# Altium PCB 2518_MEZ.PcbDoc
Units mm, origin at the board's own origin, x right, y up, seen from the top; angles counter-clockwise.
Board outline 63 x 64 mm, 2 copper layers (Top Layer, Bottom Layer); 5 components, 39 nets, 276 pads, 179 vias.
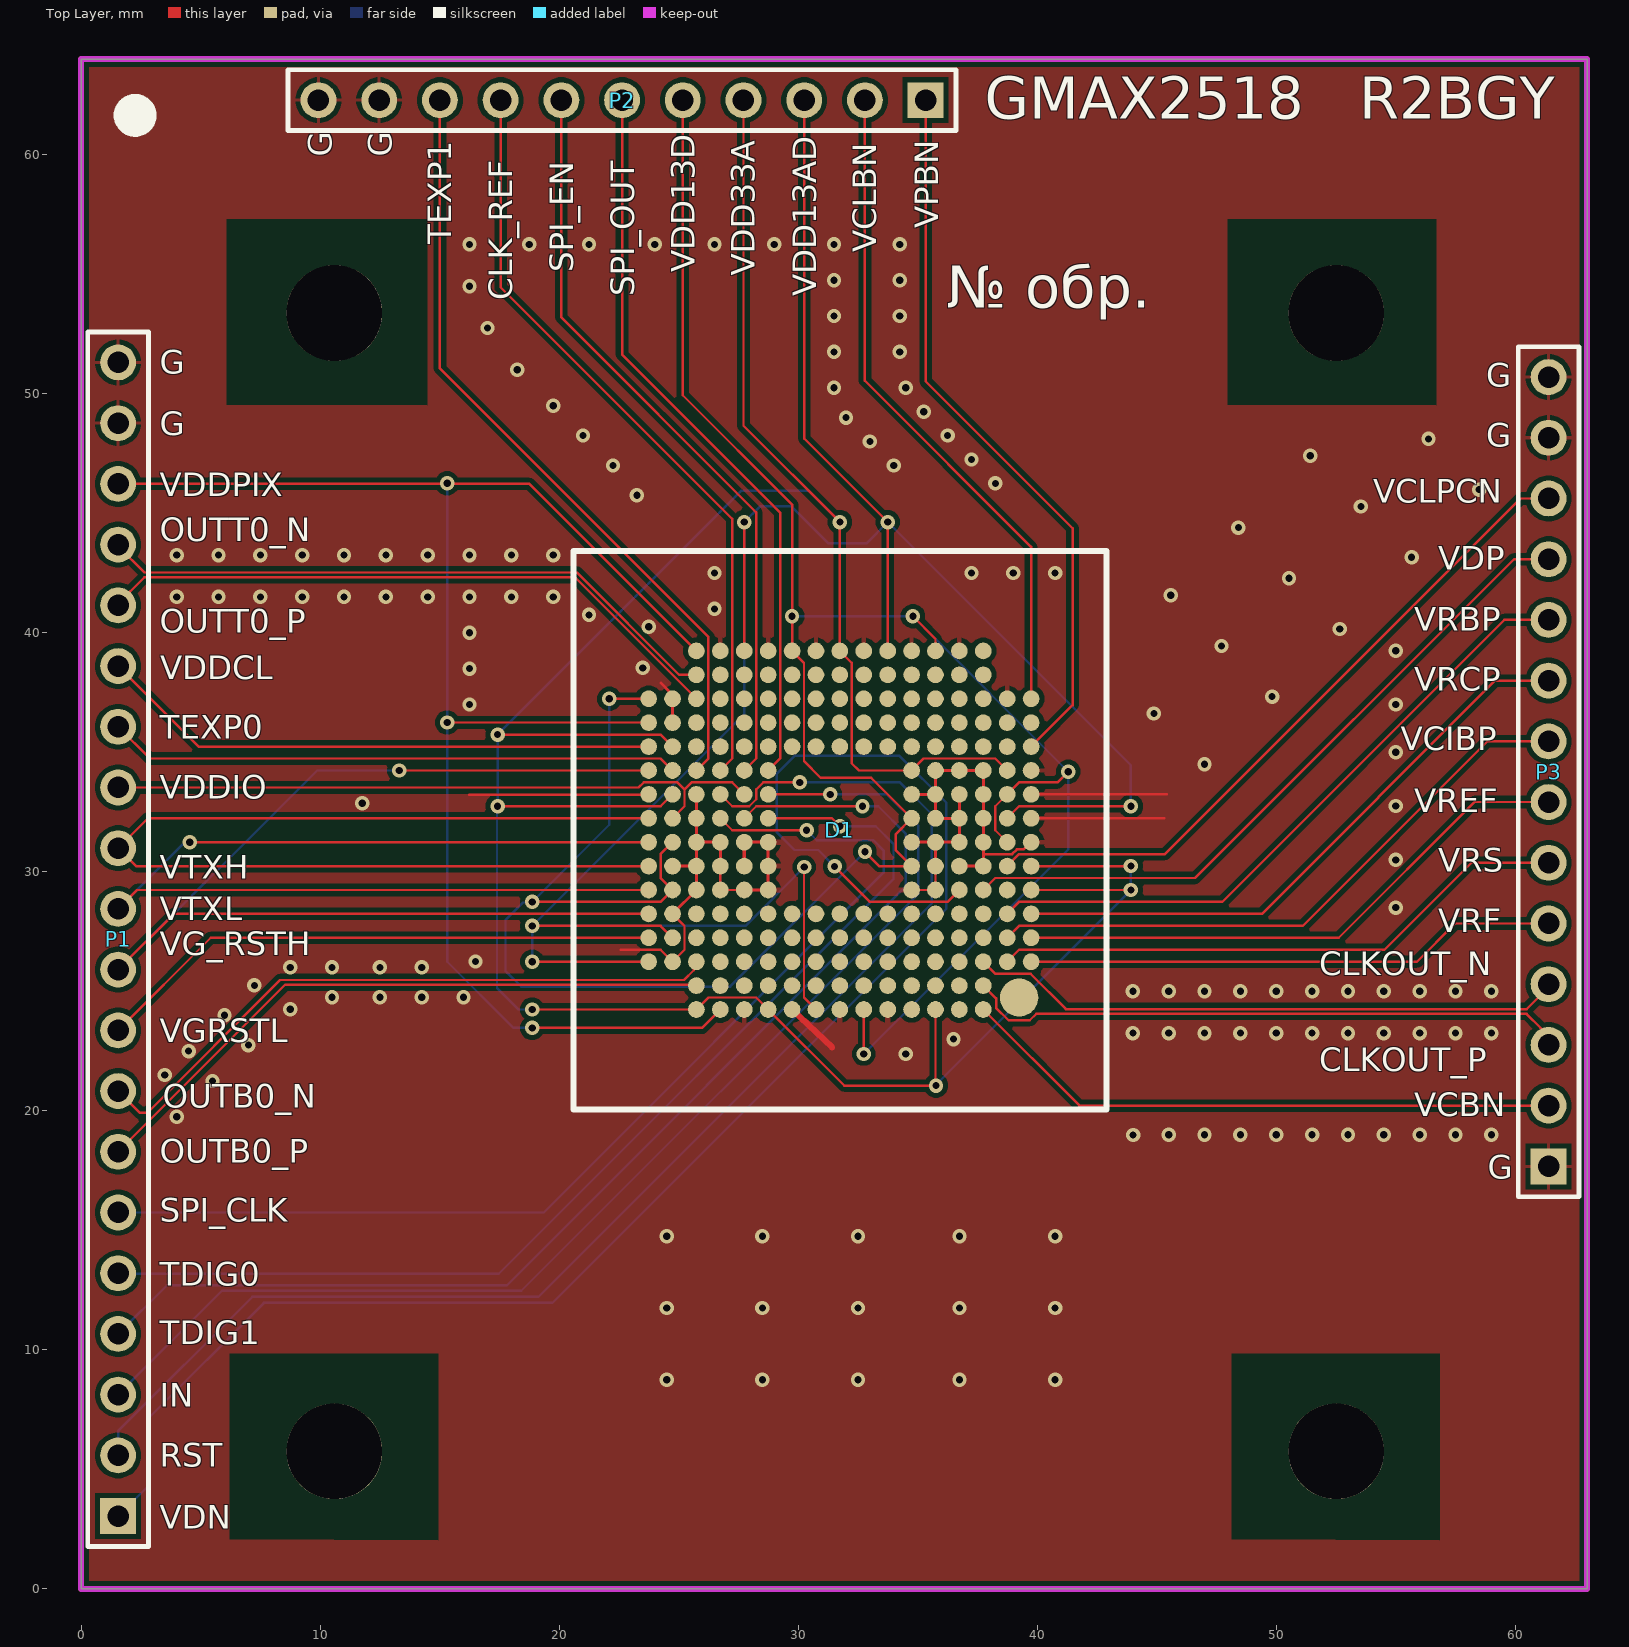
[diagram p0: Top Layer view]
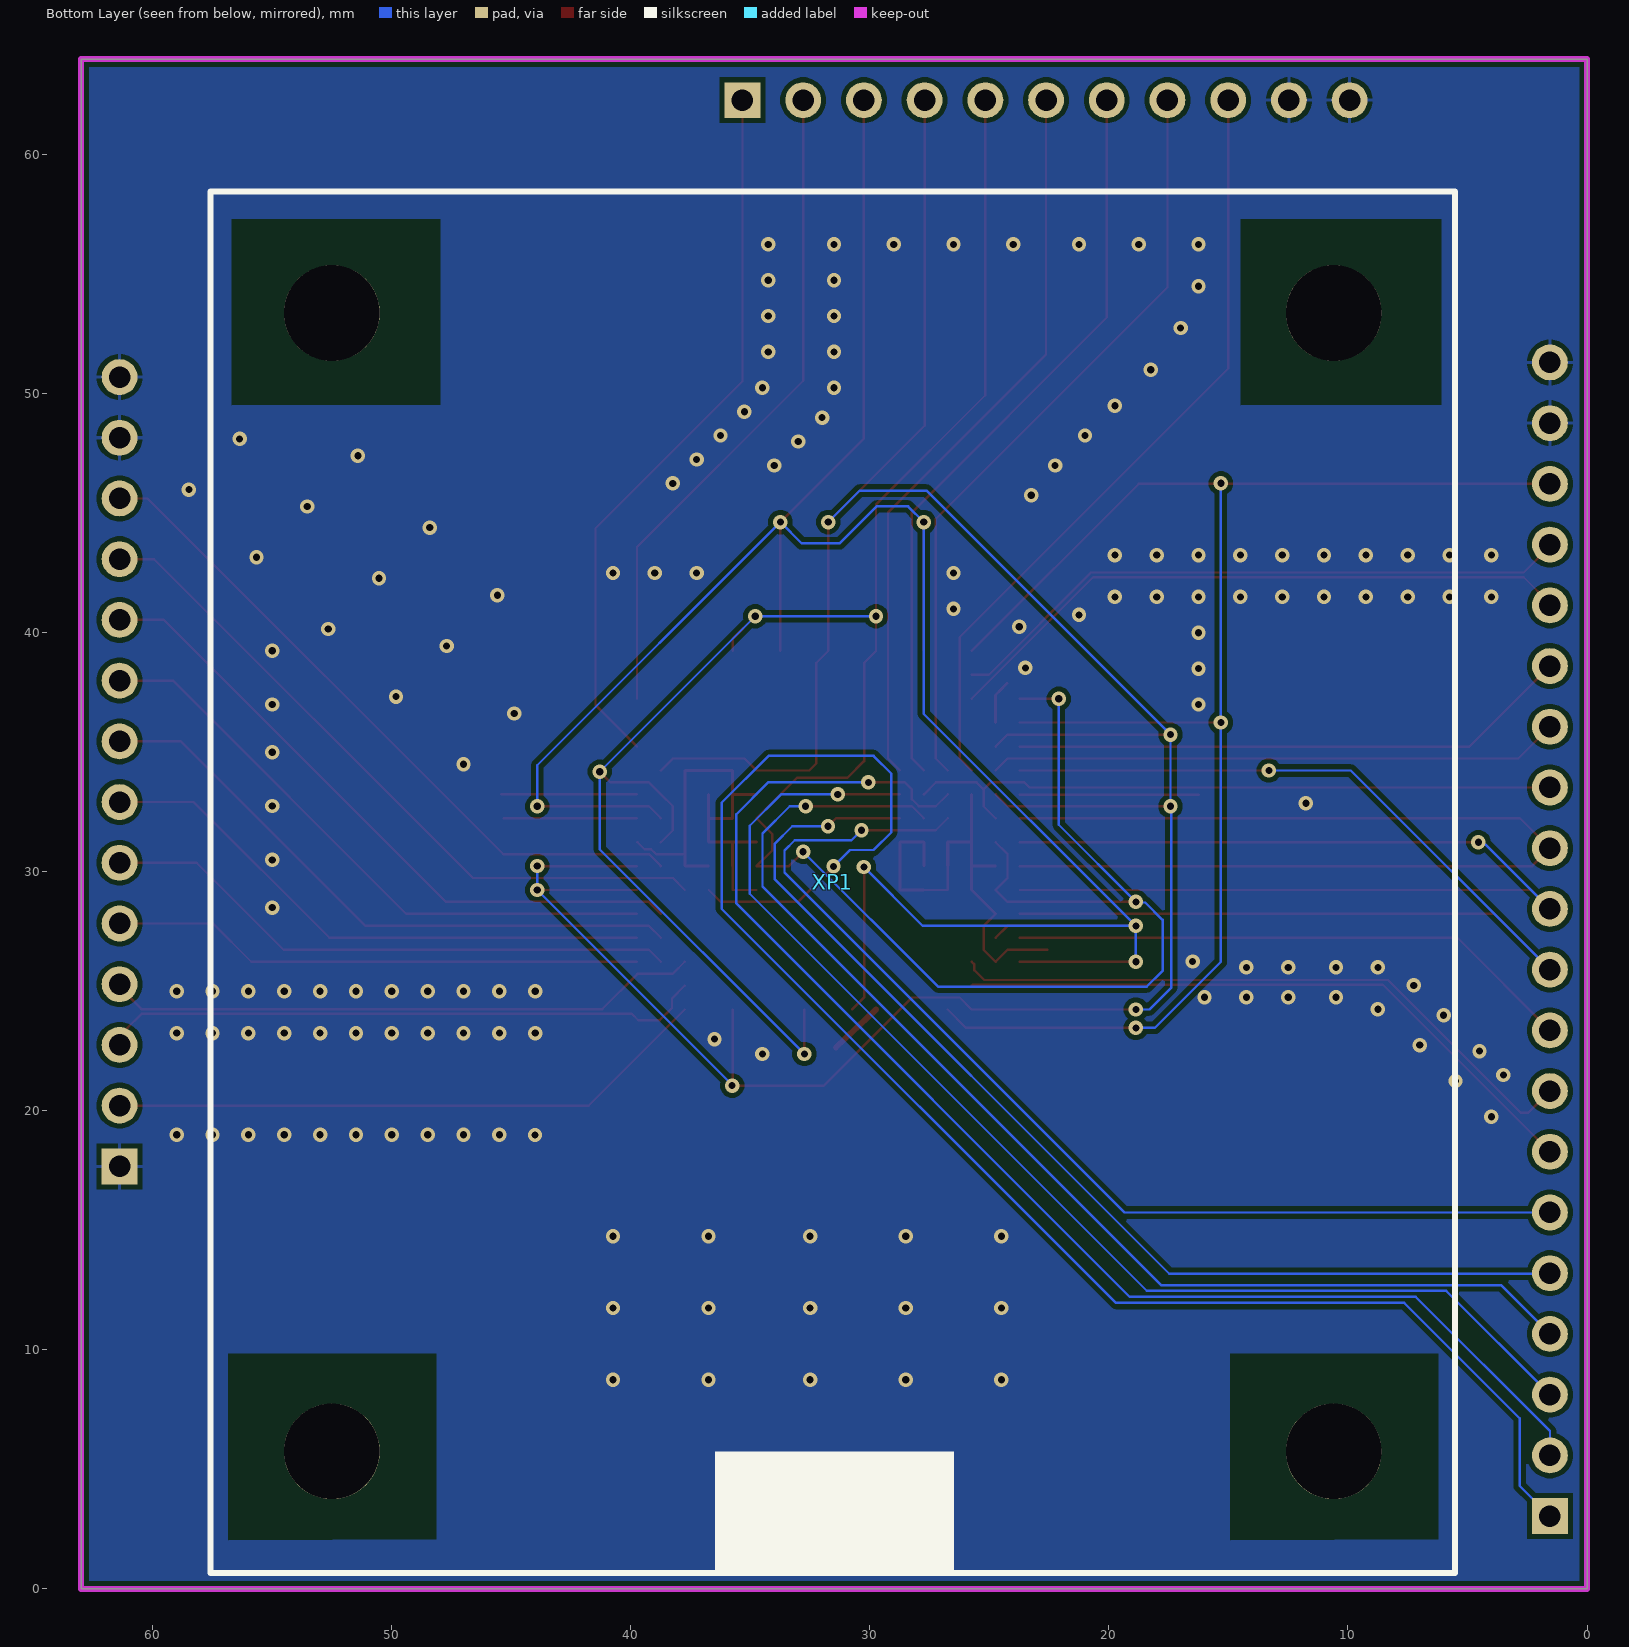
[diagram p1: Bottom Layer view, seen from below]

## Layer stack, top to bottom
Top Solder: solder mask 0.0102, Solder Resist, Dk 3.5
Top Layer: signal copper 0.0356
Dielectric 1: dielectric 0.32, FR-4, Dk 4.8
Bottom Layer: signal copper 0.0356
Bottom Solder: solder mask 0.0102, Solder Resist, Dk 3.5

## Board outline
0,0 0,64 63,64 63,0

## Design rules (kind name [scope] priority, off if disabled: settings)
BoardOutlineClearance [OnLayer('Multi-Layer')] p1: gap=0.254 ignorepadtopadclearanceinfootprint=FALSE except(0: Arc-SplitContinuation Track-SplitContinuation SMDPad-SplitContinuation THPad-SplitContinuation Via-SplitContinuation Fill-SplitContinuation Poly-SplitContinuation Region-SplitContinuation Text-SplitContinuation; 0.4: Arc-OutlineEdge Track-OutlineEdge SMDPad-OutlineEdge THPad-OutlineEdge Via-OutlineEdge Fill-OutlineEdge Poly-OutlineEdge Region-OutlineEdge Text-OutlineEdge)
Clearance [All] p1: gap=0.125 ignorepadtopadclearanceinfootprint=FALSE except(0.1: Track-Track Track-SMDPad Track-THPad Track-Via; 0.2: Arc-Fill Arc-Poly Track-Fill Track-Poly SMDPad-Fill SMDPad-Poly THPad-Fill THPad-Poly Via-Fill Via-Poly Fill-Fill Fill-Poly Poly-Poly Poly-Region Poly-Text; 0.25: Arc-Hole Track-Hole SMDPad-Hole THPad-Hole Via-Hole Fill-Hole Poly-Hole Region-Hole Text-Hole) // Standart
DiffPairsRouting [All] p1: maxlimit=0.254 minlimit=0.1 mostfreqgap=0.1 toplayer_minwidth=0.1 toplayer_maxwidth=0.381 toplayer_prefwidth=0.1 bottomlayer_minwidth=0.1 bottomlayer_maxwidth=0.381 bottomlayer_prefwidth=0.1 maxuncoupledlength=12.7
HoleSize [All] p1: absolutevalues=TRUE maxlimit=5 minlimit=0.3 maxpercent=80.000 minpercent=20.000
MinimumSolderMaskSliver [All] p1: minsoldermaskwidth=0.075
PlaneClearance "PlaneClearance-1 1/2 Oz" [All] p1: clearance=0.2 // Standart
PlaneConnect "TermalConnect-1 1/2 Oz" [All] p1: planeconnectstyle=Relief reliefexpansion=0.2 reliefentries=4 reliefconductorwidth=0.2 reliefairgap=0.2 // Standart
PolygonConnect "PolygonConnect-1 1/2 Oz" [All] p1: thpad.connectstyle=Relief thpad.reliefconductorwidth=0.15 thpad.reliefentries=4 thpad.polygonreliefangle="90 Angle" thpad.airgapwidth=0.2 smdpad.connectstyle=Relief smdpad.reliefconductorwidth=0.2 smdpad.reliefentries=4 smdpad.polygonreliefangle="90 Angle" smdpad.airgapwidth=0.2 via.connectstyle=Direct via.reliefconductorwidth=0.254 via.reliefentries=4 via.polygonreliefangle="90 Angle" via.airgapwidth=0.254 // Standart
RoutingVias [All] p1: holewidth=0.3 width=1.27 viastyle="Through Hole" minholewidth=0.3 minwidth=0.6 maxholewidth=0.711 maxwidth=1.27
SilkToSilkClearance [All] p1: silktosilkclearance=0
SilkToSolderMaskClearance [IsPad] p1: minsilkscreentomaskgap=0 clearancetoexposedcopper=TRUE
SolderMaskExpansion [All] p1: expansion=0.102 istentingtop=FALSE
UnRoutedNet [All] p1: checkbadconnections=TRUE
Width [All] p1: maxlimit=2.5 minlimit=0.1 preferedwidth=0.1
22 further rules are at their usual default settings.

## Classes and differential pairs
differential pair OUTT0: +OUTT0_P -OUTT0_N
differential pair OUTB0: +OUTB0_P -OUTB0_N
differential pair CLKOUT: +CLKOUT_P -CLKOUT_N

## Components (designator, comment, footprint, x,y, rotation, side; value= is the part's Value field where it differs from the comment)
D1 "GMAX2518" GMAX2518 39.243,24.74 r0 top
P1 "Header 20" HDR1X20 1.549,3.048 r90 top
P2 "Header 11" HDR1X11 35.331,62.281 r180 top
P3 "Header 14" HDR1X14 61.392,17.678 r90 top
XP1 "Грелка" Грелка 10.598,53.377 r90 bottom

## Footprints (in the part's own frame and the unit in brackets; to place one, negate y for a bottom-side part, rotate by r counter-clockwise, add the part's x,y. Pads: shape width x height; smd on the part's side, far side on the other; paste and mask are expansions set on the pad)
GMAX2518 [mm] "GMAX2518"
  round 1.6 smd: 3(0,0)
  round 0.7 smd: A3(-1.5,-0.5) A4(-2.5,-0.5) A5(-3.5,-0.5) A6(-4.5,-0.5) A7(-5.5,-0.5) A8(-6.5,-0.5) A9(-7.5,-0.5) A10(-8.5,-0.5) A11(-9.5,-0.5) A12(-10.5,-0.5) A13(-11.5,-0.5) A14(-12.5,-0.5) A15(-13.5,-0.5) B3(-1.5,0.5) B4(-2.5,0.5) B5(-3.5,0.5) B6(-4.5,0.5) B7(-5.5,0.5) B8(-6.5,0.5) B9(-7.5,0.5) B10(-8.5,0.5) B11(-9.5,0.5) B12(-10.5,0.5) B13(-11.5,0.5) B14(-12.5,0.5) B15(-13.5,0.5) C1(0.5,1.5) C2(-0.5,1.5) C3(-1.5,1.5) C4(-2.5,1.5) C5(-3.5,1.5) C6(-4.5,1.5) C7(-5.5,1.5) C8(-6.5,1.5) C9(-7.5,1.5) C10(-8.5,1.5) C11(-9.5,1.5) C12(-10.5,1.5) C13(-11.5,1.5) C14(-12.5,1.5) C15(-13.5,1.5) C16(-14.5,1.5) C17(-15.5,1.5) D1(0.5,2.5) D2(-0.5,2.5) D3(-1.5,2.5) D4(-2.5,2.5) D5(-3.5,2.5) D6(-4.5,2.5) D7(-5.5,2.5) D8(-6.5,2.5) D9(-7.5,2.5) D10(-8.5,2.5) D11(-9.5,2.5) D12(-10.5,2.5) D13(-11.5,2.5) D14(-12.5,2.5) D15(-13.5,2.5) D16(-14.5,2.5) D17(-15.5,2.5) E1(0.5,3.5) E2(-0.5,3.5) E3(-1.5,3.5) E4(-2.5,3.5) E5(-3.5,3.5) E6(-4.5,3.5) E7(-5.5,3.5) E8(-6.5,3.5) E9(-7.5,3.5) E10(-8.5,3.5) E11(-9.5,3.5) E12(-10.5,3.5) E13(-11.5,3.5) E14(-12.5,3.5) E15(-13.5,3.5) E16(-14.5,3.5) E17(-15.5,3.5) F1(0.5,4.5) F2(-0.5,4.5) F3(-1.5,4.5) F4(-2.5,4.5) F5(-3.5,4.5) F6(-4.5,4.5) F12(-10.5,4.5) F13(-11.5,4.5) F14(-12.5,4.5) F15(-13.5,4.5) F16(-14.5,4.5) F17(-15.5,4.5) G1(0.5,5.5) G2(-0.5,5.5) G3(-1.5,5.5) G4(-2.5,5.5) G5(-3.5,5.5) G6(-4.5,5.5) G12(-10.5,5.5) G13(-11.5,5.5) G14(-12.5,5.5) G15(-13.5,5.5) G16(-14.5,5.5) G17(-15.5,5.5) H1(0.5,6.5) H2(-0.5,6.5) H3(-1.5,6.5) H4(-2.5,6.5) H5(-3.5,6.5) H6(-4.5,6.5) H12(-10.5,6.5) H13(-11.5,6.5) H14(-12.5,6.5) H15(-13.5,6.5) H16(-14.5,6.5) H17(-15.5,6.5) J1(0.5,7.5) J2(-0.5,7.5) J3(-1.5,7.5) J4(-2.5,7.5) J5(-3.5,7.5) J6(-4.5,7.5) J12(-10.5,7.5) J13(-11.5,7.5) J14(-12.5,7.5) J15(-13.5,7.5) J16(-14.5,7.5) J17(-15.5,7.5) K1(0.5,8.5) K2(-0.5,8.5) K3(-1.5,8.5) K4(-2.5,8.5) K5(-3.5,8.5) K6(-4.5,8.5) K12(-10.5,8.5) K13(-11.5,8.5) K14(-12.5,8.5) K15(-13.5,8.5) K16(-14.5,8.5) K17(-15.5,8.5) L1(0.5,9.5) L2(-0.5,9.5) L3(-1.5,9.5) L4(-2.5,9.5) L5(-3.5,9.5) L6(-4.5,9.5) L12(-10.5,9.5) L13(-11.5,9.5) L14(-12.5,9.5) L15(-13.5,9.5) L16(-14.5,9.5) L17(-15.5,9.5) M1(0.5,10.5) M2(-0.5,10.5) M3(-1.5,10.5) M4(-2.5,10.5) M5(-3.5,10.5) M6(-4.5,10.5) M7(-5.5,10.5) M8(-6.5,10.5) M9(-7.5,10.5) M10(-8.5,10.5) M11(-9.5,10.5) M12(-10.5,10.5) M13(-11.5,10.5) M14(-12.5,10.5) M15(-13.5,10.5) M16(-14.5,10.5) M17(-15.5,10.5) N1(0.5,11.5) N2(-0.5,11.5) N3(-1.5,11.5) N4(-2.5,11.5) N5(-3.5,11.5) N6(-4.5,11.5) N7(-5.5,11.5) N8(-6.5,11.5) N9(-7.5,11.5) N10(-8.5,11.5) N11(-9.5,11.5) N12(-10.5,11.5) N13(-11.5,11.5) N14(-12.5,11.5) N15(-13.5,11.5) N16(-14.5,11.5) N17(-15.5,11.5) P1(0.5,12.5) P2(-0.5,12.5) P3(-1.5,12.5) P4(-2.5,12.5) P5(-3.5,12.5) P6(-4.5,12.5) P7(-5.5,12.5) P8(-6.5,12.5) P9(-7.5,12.5) P10(-8.5,12.5) P11(-9.5,12.5) P12(-10.5,12.5) P13(-11.5,12.5) P14(-12.5,12.5) P15(-13.5,12.5) P16(-14.5,12.5) P17(-15.5,12.5) R3(-1.5,13.5) R4(-2.5,13.5) R5(-3.5,13.5) R6(-4.5,13.5) R7(-5.5,13.5) R8(-6.5,13.5) R9(-7.5,13.5) R10(-8.5,13.5) R11(-9.5,13.5) R12(-10.5,13.5) R13(-11.5,13.5) R14(-12.5,13.5) R15(-13.5,13.5) T3(-1.5,14.5) T4(-2.5,14.5) T5(-3.5,14.5) T6(-4.5,14.5) T7(-5.5,14.5) T8(-6.5,14.5) T9(-7.5,14.5) T10(-8.5,14.5) T11(-9.5,14.5) T12(-10.5,14.5) T13(-11.5,14.5) T14(-12.5,14.5) T15(-13.5,14.5)
  silkscreen extent -18.65,-4.67 3.65,18.68
HDR1X11 [mm] "Connector; Header; 11 Position"
  rect 1.5x1.5 hole 0.9: 1(0,0)
  round 1.5 hole 0.9: 2(2.54,0) 3(5.08,0) 4(7.62,0) 5(10.16,0) 6(12.7,0) 7(15.24,0) 8(17.78,0) 9(20.32,0) 10(22.86,0) 11(25.4,0)
  silkscreen extent -1.27,-1.27 26.67,1.27
HDR1X14 [mm] "Connector; Header; 14 Position"
  rect 1.5x1.5 hole 0.9: 1(0,0)
  round 1.5 hole 0.9: 2(2.54,0) 3(5.08,0) 4(7.62,0) 5(10.16,0) 6(12.7,0) 7(15.24,0) 8(17.78,0) 9(20.32,0) 10(22.86,0) 11(25.4,0) 12(27.94,0) 13(30.48,0) 14(33.02,0)
  silkscreen extent -1.27,-1.27 34.29,1.27
HDR1X20 [mm] "Connector; Header; 20 Position"
  rect 1.5x1.5 hole 0.9: 1(0,0)
  round 1.5 hole 0.9: 2(2.54,0) 3(5.08,0) 4(7.62,0) 5(10.16,0) 6(12.7,0) 7(15.24,0) 8(17.78,0) 9(20.32,0) 10(22.86,0) 11(25.4,0) 12(27.94,0) 13(30.48,0) 14(33.02,0) 15(35.56,0) 16(38.1,0) 17(40.64,0) 18(43.18,0) 19(45.72,0) 20(48.26,0)
  silkscreen extent -1.27,-1.27 49.53,1.27
Грелка [mm]
  round 4 hole 4 unplated: 0(-47.625,0) 0(-47.625,41.91) 0(0,0) 0(0,41.91)
  silkscreen extent -52.7,-5.08 5.08,46.99

## Part data
P1: "Header, 20-Pin", LatestRevisionDate=17-Jul-2002, LatestRevisionNote="Re-released for DXP Platform.", Publisher="Altium Limited"
P2: "Header, 11-Pin", LatestRevisionDate=17-Jul-2002, LatestRevisionNote="Re-released for DXP Platform.", Publisher="Altium Limited"
P3: "Header, 14-Pin", LatestRevisionDate=17-Jul-2002, LatestRevisionNote="Re-released for DXP Platform.", Publisher="Altium Limited"

## Via types
v1: diameter 0.6, hole 0.3, Top Layer to Bottom Layer, 179 vias

## Nets (pads, with @x,y where several pads share a name; then routed paths per layer and width w, separated by ;. In a path a pad name is that pad's centre, name@x,y a point inside that pad or via, vN(x,y) a via of type N, cw(c..) or ccw(c..) an arc to the next point about the centre after c; other vN are vias at no path point)
CLK_REF: D1.L14 P2.8 | length 32.3
  Top Layer w0.1: P2.8 17.551,54.458 27.243,44.766 27.243,34.74 D1.L14
CLKOUT_N: D1.C3 P3.4 | length 25
  Top Layer w0.1: D1.C3 38.252,25.73 39.726,25.73 41.199,24.257 42.066,24.257 60.477,24.257 61.392,25.171 P3.4
CLKOUT_P: D1.B3 P3.3 | length 25.4
  Top Layer w0.1: D1.B3 38.278,24.705 38.278,24.308 38.796,23.79 39.69,23.79 39.957,24.057 42.034,24.057 42.149,24.057 60.474,24.057 61.046,23.485 61.046,23.483 61.392,23.137 P3.3
GND: D1.A7 D1.A9 D1.A11 D1.A13 D1.C16 D1.E16 D1.F5 D1.F6 D1.F12 D1.F13 D1.F14 D1.F15 D1.G3 D1.G4 D1.G5 D1.G12 D1.G13 D1.G14 D1.G15 D1.G16 D1.H1 D1.H3 D1.H4 D1.H5 D1.H6 D1.H12 D1.H13 D1.H14 D1.H15 D1.J1 D1.J3 D1.J4 D1.J5 D1.J15 D1.K1 D1.K3 D1.K4 D1.K5 D1.K6 D1.K15 D1.K17 D1.L1 D1.L3 D1.L4 D1.L5 D1.N16 D1.P2 D1.P16 D1.T4 D1.T6 D1.T8 D1.T10 D1.T12 D1.T14 P1.19 P1.20 P2.10 P2.11 P3.1 P3.13 P3.14 | length 63.3
  Top Layer w0.1: 16.231,33.223 D1.K17@23.727,33.223 ; 22.58,26.746 22.586,26.74 24.243,26.74 D1.C16 25.243,26.74 25.243,27.74 D1.E16 ; D1.G14 D1.F14 D1.F13 ; D1.F6 D1.F5 D1.G5 ; 37.743,30.74 38.95,30.74 39.15,30.94 39.419,30.94 39.719,31.24 D1.H1 ; D1.J1 45.321,32.24 ; D1.K1 45.424,33.24
  Top Layer w0.127: 24.257,37.897 24.573,37.58 24.573,37.564 24.743,37.395 D1.P16 D1.N16 ; D1.E16 D1.F15 D1.G15 ; D1.G16 D1.G15 ; D1.K15 D1.J15 D1.H15 ; D1.G14 D1.H14 D1.H15 ; D1.F13 D1.F12 D1.G12 D1.H12 D1.H13 D1.G13 ; D1.H6 D1.H5 ; D1.K6 D1.K5 ; D1.G5 D1.H5 ; D1.J5 D1.K5 ; D1.J5@35.75,32.233 D1.J4@36.736,32.233 ; D1.G4 D1.G3 37.743,30.74 D1.H3 D1.J3 D1.K3 D1.L3 D1.L4 D1.L5 D1.K5 ; D1.K4 D1.J4 D1.H4 D1.H5 ; D1.G15 D1.H15
  Top Layer w0.254: D1.A11 31.42,22.657
  other v1: 24.5,8.75 28.5,8.75 32.5,8.75 36.75,8.75 40.75,8.75 24.5,11.75 28.5,11.75 32.5,11.75 36.75,11.75 40.75,11.75 24.5,14.75 28.5,14.75 32.5,14.75 36.75,14.75 40.75,14.75 44.01,18.99 45.5,19 47,19 48.5,19 50,19 51.5,19 53,19 54.5,19 56,19 57.5,19 59,19 4,19.75 5.5,21.25 3.5,21.5 34.5,22.377 4.5,22.5 7,22.75 36.5,23 44,23.25 45.5,23.25 47,23.25 48.5,23.25 50,23.25 51.5,23.25 53,23.25 54.5,23.25 56,23.25 57.5,23.25 59,23.25 6,24 8.75,24.25 10.5,24.75 12.5,24.75 14.25,24.75 16,24.75 44,25 45.5,25 47,25 48.5,25 50,25 51.5,25 53,25 54.5,25 56,25 57.5,25 59,25 7.25,25.25 8.75,26 10.5,26 12.5,26 14.25,26 16.5,26.25 55,28.5 55,30.5 55,32.75 11.761,32.869 47,34.5 55,35 44.879,36.621 16.25,37 55,37 49.828,37.328 16.25,38.5 23.495,38.532 55,39.25 47.707,39.45 16.25,40 52.657,40.157 23.75,40.25 21.25,40.75 26.5,41 4,41.5 5.75,41.5 7.5,41.5 9.25,41.5 11,41.5 12.75,41.5 14.5,41.5 16.25,41.5 18,41.5 19.75,41.5 45.586,41.571 50.536,42.278 26.5,42.5 37.25,42.5 39,42.5 40.75,42.5 55.662,43.162 4,43.25 5.75,43.25 7.5,43.25 9.25,43.25 11,43.25 12.75,43.25 14.5,43.25 16.25,43.25 18,43.25 19.75,43.25 48.414,44.399 53.541,45.283 23.25,45.75 58.49,45.99 38.25,46.25 22.25,47 34,47 37.25,47.25 51.419,47.405 33,48 56.369,48.112 21,48.25 36.25,48.25 32,49 35.25,49.25 19.75,49.5 31.5,50.25 34.5,50.25 18.25,51 31.5,51.75 34.25,51.75 17,52.75 31.5,53.25 34.25,53.25 16.25,54.5 31.5,54.75 34.25,54.75 16.25,56.25 18.75,56.25 21.25,56.25 24,56.25 26.5,56.25 29,56.25 31.5,56.25 34.25,56.25
OUTB0_N: D1.C15 P1.8 | length 27.3
  Top Layer w0.1: P1.8 2.464,19.914 2.765,19.914 8.324,25.473 25.219,25.473 25.628,25.882 25.628,26.125 D1.C15
OUTB0_P: D1.B15 P1.7 | length 27.1
  Top Layer w0.1: P1.7 8.534,25.273 25.71,25.273 D1.B15
OUTT0_N: D1.R15 P1.17 | length 26.4
  Top Layer w0.1: P1.17@1.549,43.619 2.649,42.52 20.746,42.52 25.026,38.24 D1.R15
OUTT0_P: D1.P15 P1.16 | length 26.8
  Top Layer w0.1: P1.16@1.549,41.22 2.649,42.32 20.663,42.32 D1.P15
SPI_CLK: D1.J14 P1.6 | length 46.2
  Top Layer w0.1: D1.J14 27.243,31.74 v1@30.353,31.74
  Bottom Layer w0.1: P1.6 19.355,15.748 33.573,29.966 33.573,30.892 33.147,31.318 30.776,31.318 v1(30.354,31.741)
SPI_EN: D1.L13 P2.7 | length 31.6
  Top Layer w0.1: P2.7 20.091,53.188 28.243,45.036 28.243,34.74 D1.L13
SPI_IN: D1.K12 P1.3 | length 51.8
  Top Layer w0.1: D1.K12 v1@31.344,33.24
  Bottom Layer w0.1: P1.3 5.893,12.471 18.415,12.471 35.027,29.083 35.027,31.928 33.714,33.241 v1(31.345,33.241)
SPI_OUT: D1.L12 P2.6 | length 31
  Top Layer w0.1: P2.6 22.631,51.638 29.243,45.027 29.243,34.74 D1.L12
SYS_RST_N: D1.K14 P1.2 | length 58.2
  Top Layer w0.1: D1.K14 27.243,32.74 27.95,32.74 28.243,33.032 28.243,33.447 28.536,33.74 v1(30.065,33.74)
  Bottom Layer w0.1: P1.2 1.549,6.604 7.163,12.217 19.126,12.217 35.585,28.677 35.585,32.41 34.256,33.74 v1(30.065,33.74)
TDIG0: D1.J12 P1.5 | length 46.4
  Top Layer w0.1: D1.J12 31.413,32.24 v1@31.75,31.902
  Bottom Layer w0.1: P1.5@1.549,13.183 17.475,13.183 33.985,29.693 33.985,31.166 33.248,31.903 v1(31.751,31.903)
TDIG1: D1.J13 P1.4 | length 50.3
  Top Layer w0.1: D1.J13 28.243,32.74 v1(32.69,32.741) v1(32.69,32.741)
  Bottom Layer w0.1: P1.4 3.581,12.7 17.805,12.7 34.493,29.388 34.493,31.598 33.35,32.741 v1(32.69,32.741)
TEXP0: D1.L16 P1.14 | length 24
  Top Layer w0.1: P1.14 2.878,34.74 23.95,34.74 24.243,34.74 D1.L16
TEXP1: D1.L15 P2.9 | length 32.9
  Top Layer w0.1: P2.9 15.011,51.054 26.243,39.822 26.243,34.74 D1.L15
VCBN: D1.A3 P3.2 | length 25.3
  Top Layer w0.1: D1.A3 41.764,20.218 P3.2
VCIBP: D1.D2 P3.8 | length 26.1
  Top Layer w0.1: D1.D2 39.243,27.74 51.108,27.74 58.826,35.458 P3.8
VCLBN: D1.P1 P2.2 | length 27.9
  Top Layer w0.1: P2.2 32.791,50.546 39.743,43.594 D1.P1
VCLPCN: D1.G2 P3.12 | length 29.1
  Top Layer w0.1: D1.G2 39.243,30.74 45.339,30.74 60.218,45.618 P3.12@61.498,45.618
VDD13AD: D1.A10 D1.C17 D1.D16 D1.J2 D1.T7 D1.T13 P2.3 | length 110.2
  Top Layer w0.1: v1@18.872,26.24 D1.C17 ; v1@18.872,27.737 23.317,27.737 23.32,27.74 24.243,27.74 D1.D16 ; D1.T13 v1@27.743,44.628 ; v1@30.243,30.201 30.243,24.74 D1.A10 ; P2.3 30.251,48.121 v1(33.744,44.629) ; D1.T7 v1@33.743,44.628 ; D1.J2 39.243,32.74 v1@43.917,32.74
  Bottom Layer w0.1: v1(18.873,26.241) v1(18.873,27.738) ; v1(30.251,30.201) 27.789,27.738 v1(18.873,27.738) ; v1(43.918,32.741) 43.918,34.455 v1(33.744,44.629) 32.854,43.739 31.267,43.739 29.718,45.288 28.403,45.288 v1(27.744,44.629) 27.744,36.609 v1(18.873,27.738)
VDD13D: D1.A8 D1.F16 D1.G6 D1.H2 D1.H16 D1.J6 D1.K2 D1.P17 D1.T5 D1.T11 P2.5 | length 119.8
  Top Layer w0.1: v1@18.872,28.74 24.243,28.74 D1.F16 24.243,29.74 24.243,30.74 D1.H16 ; v1@22.101,37.24 D1.P17 ; P2.5 25.171,49.936 29.744,45.364 29.744,40.691 D1.T11 ; D1.T11 30.243,38.74 30.243,34.629 30.937,33.934 33.048,33.934 D1.J6 34.087,31.583 34.087,30.896 D1.G6 33.387,30.24 v1@32.791,30.836 ; v1(32.741,22.377) D1.A8@32.744,24.24 ; v1(34.798,40.691) 35.743,39.746 D1.T5 ; D1.H2 38.243,31.74 38.243,32.74 D1.K2 39.243,33.74 40.852,33.74 v1(41.3,34.188)
  Bottom Layer w0.1: v1(22.098,37.236) 22.098,31.965 v1(18.873,28.741) 18.851,28.718 18.482,28.718 17.755,27.991 17.755,25.857 18.415,25.197 27.153,25.197 v1(32.792,30.837) ; v1(29.743,40.691) v1(34.798,40.691) v1(41.3,34.188) 41.3,30.937 v1(32.741,22.377)
VDD33A: D1.A5 D1.A12 D1.A15 D1.F1 D1.G1 D1.K16 D1.L2 D1.L6 D1.M16 D1.T9 P2.4 | length 125.9
  Top Layer w0.1: v1@17.425,32.74 24.243,32.74 D1.K16 ; v1(17.424,35.738) 17.426,35.74 24.243,35.74 D1.M16 ; v1@18.872,24.24 D1.A15 26.243,24.74 28.243,24.74 D1.A12 31.926,21.057 v1(35.763,21.057) ; P2.4 27.711,48.661 v1(31.744,44.629) ; v1@31.743,44.628 D1.T9 32.243,38.74 32.243,34.534 32.537,34.24 D1.L6 35.243,34.74 38.243,34.74 D1.L2 ; v1@35.743,21.077 D1.A5 ; D1.F1 v1@43.917,29.24 ; D1.G1 v1@43.917,30.24
  Bottom Layer w0.1: v1@17.399,32.715 17.399,25.146 18.304,24.241 v1(18.873,24.241) ; v1(17.424,32.741) v1(17.424,35.738) 27.635,45.949 30.424,45.949 v1(31.744,44.629) ; v1@35.748,21.071 v1(43.918,29.241) v1(43.918,30.241)
VDDCL: D1.M17 P1.15 | length 23.6
  Top Layer w0.1: P1.15 4.918,35.24 D1.M17
VDDIO: D1.J16 D1.K13 P1.13 | length 28.1
  Top Layer w0.1: P1.13 23.324,33.528 23.536,33.74 24.95,33.74 25.243,33.447 ; D1.J16 25.243,32.74 25.243,33.447 ; D1.K13 27.243,33.74 25.536,33.74 25.243,33.447
VDDPIX: D1.A14 D1.N17 D1.T15 P1.18 | length 68.4
  Top Layer w0.1: P1.18 v1@15.291,46.228 ; v1(15.316,36.246) D1.N17@23.737,36.246 ; v1@15.342,46.228 18.755,46.228 D1.T15 ; v1@18.872,23.47 25.973,23.47 D1.A14
  Bottom Layer w0.1: v1(15.316,46.253) v1(15.316,36.246) 15.316,26.238 18.084,23.471 v1(18.873,23.471)
VDN: D1.F4 P1.1 | length 71
  Top Layer w0.1: v1@31.521,30.226 33.008,28.74 36.243,28.74 D1.F4
  Bottom Layer w0.1: P1.1 2.819,4.318 2.819,7.137 7.645,11.963 19.71,11.963 36.195,28.448 36.195,32.893 34.239,34.849 29.845,34.849 29.108,34.112 29.108,31.648 29.845,30.912 30.838,30.912 v1(31.522,30.227)
VDP: D1.F3 P3.11 | length 29.4
  Top Layer w0.1: D1.F3 38.243,29.74 46.605,29.74 59.944,43.078 P3.11
VG_RSTH: D1.E17 D1.L17 P1.10 | length 48.8
  Top Layer w0.1: P1.10 3.881,28.24 D1.E17 ; v1(13.31,34.24) D1.L17
  Bottom Layer w0.1: P1.10 9.881,34.24 v1(13.31,34.24)
VGRSTL: D1.D17 P1.9 | length 23.8
  Top Layer w0.1: P1.9 5.421,27.24 D1.D17
VPBN: D1.M1 P2.1 | length 30.3
  Top Layer w0.1: P2.1 35.331,50.521 41.478,44.374 41.478,36.975 D1.M1
VRBP: D1.E2 P3.10 | length 27.7
  Top Layer w0.1: D1.E2 39.243,28.74 47.739,28.74 59.538,40.538 P3.10
VRCP: D1.E1 P3.9 | length 25.7
  Top Layer w0.1: D1.E1 49.398,28.24 59.157,37.998 P3.9
VREF: D1.D1 P3.7 | length 24
  Top Layer w0.1: D1.D1 52.614,27.24 58.293,32.918 P3.7
VRF: D1.C1 P3.5 | length 22.3
  Top Layer w0.1: D1.C1 55.881,26.24 57.48,27.838 P3.5
VRS: D1.C2 P3.6 | length 24.4
  Top Layer w0.1: D1.C2 39.243,26.74 54.527,26.74 58.166,30.378 P3.6
VTXH: D1.G17 D1.J17 P1.12 | length 45.2
  Top Layer w0.1: D1.G17 2.298,30.24 P1.12 2.801,32.24 D1.J17
VTXL: D1.F17 D1.H17 P1.11 | length 45.9
  Top Layer w0.1: P1.11 2.341,29.24 D1.F17 ; v1@4.545,31.24 D1.H17
  Bottom Layer w0.1: P1.11 4.246,31.144 4.449,31.144 v1(4.545,31.24)
pads on no net: D1.3 D1.A4 D1.A6 D1.B4 D1.B5 D1.B6 D1.B7 D1.B8 D1.B9 D1.B10 D1.B11 D1.B12 D1.B13 D1.B14 D1.C4 D1.C5 D1.C6 D1.C7 D1.C8 D1.C9 D1.C10 D1.C11 D1.C12 D1.C13 D1.C14 D1.D3 D1.D4 D1.D5 D1.D6 D1.D7 D1.D8 D1.D9 D1.D10 D1.D11 D1.D12 D1.D13 D1.D14 D1.D15 D1.E3 D1.E4 D1.E5 D1.E6 D1.E7 D1.E8 D1.E9 D1.E10 D1.E11 D1.E12 D1.E13 D1.E14 D1.E15 D1.F2 D1.M2 D1.M3 D1.M4 D1.M5 D1.M6 D1.M7 D1.M8 D1.M9 D1.M10 D1.M11 D1.M12 D1.M13 D1.M14 D1.M15 D1.N1 D1.N2 D1.N3 D1.N4 D1.N5 D1.N6 D1.N7 D1.N8 D1.N9 D1.N10 D1.N11 D1.N12 D1.N13 D1.N14 D1.N15 D1.P3 D1.P4 D1.P5 D1.P6 D1.P7 D1.P8 D1.P9 D1.P10 D1.P11 D1.P12 D1.P13 D1.P14 D1.R3 D1.R4 D1.R5 D1.R6 D1.R7 D1.R8 D1.R9 D1.R10 D1.R11 D1.R12 D1.R13 D1.R14 D1.T3 XP1.0

## Polygon pours and split planes (outlines as drawn)
GND on Bottom Layer "Top Overlay-No Net" (solid, remove dead copper, pour order 1): 0,64 0,0 63,0 63,64
GND on Top Layer "Top Overlay-No Net" (solid, remove dead copper, pour order 0): 0,64 0,0 63,0 63,64

## Keep-outs
Keep-Out Layer:
  the board outline again, w0.254

## Other copper
Multi-Layer:
  pour cut-out: 14.935,2.043 14.935,9.83 6.223,9.83 6.223,2.069
  pour cut-out: 56.845,2.043 56.845,9.83 48.133,9.83 48.133,2.069
  pour cut-out: 56.693,49.516 56.693,57.302 47.981,57.302 47.981,49.541
  pour cut-out: 14.478,49.517 14.478,57.302 6.096,57.302 6.096,49.541

## Silkscreen, mask and mechanical layers (free items; w line width, h text height)
Top Overlay:
  circle w1: c2.261,61.646 r0.398
  text "GMAX2518   R2BGY" at 37.795,60.909 h3
  text "G" at 10.482,59.916 h1 r90
  text "G" at 12.997,59.916 h1 r90
  text "VPBN" at 35.857,56.92 h1 r90
  text "TEXP1" at 15.486,56.254 h1 r90
  text "VCLBN" at 33.266,55.921 h1 r90
  text "SPI_EN" at 20.584,55.087 h1 r90
  text "VDD13D" at 25.671,55.088 h1 r90
  text "VDD33A" at 28.186,54.927 h1 r90
  text "SPI_OUT" at 23.15,54.079 h1 r90
  text "VDD13AD" at 30.751,54.088 h1 r90
  text "CLK_REF" at 18.044,53.919 h1 r90
  text "№ обр." at 36.211,53.021 h3
  text "G" at 3.297,50.834 h1
  text "G" at 58.783,50.3 h1
  text "G" at 3.299,48.268 h1
  text "G" at 58.783,47.772 h1
  text "VDDPIX" at 3.297,45.703 h1
  text "VCLPCN" at 54.064,45.449 h1
  text "OUTT0_N" at 3.297,43.83 h1
  text "VDP" at 56.782,42.629 h1
  text "VRBP" at 55.774,40.089 h1
  text "OUTT0_P" at 3.297,39.995 h1
  text "VDDCL" at 3.306,38.057 h1
  text "VRCP" at 55.774,37.575 h1
  text "TEXP0" at 3.297,35.568 h1
  text "VCIBP" at 55.206,35.086 h1
  text "VDDIO" at 3.297,33.054 h1
  text "VREF" at 55.774,32.495 h1
  text "VRS" at 56.782,30.006 h1
  text "VTXH" at 3.298,29.701 h1
  text "VTXL" at 3.298,27.974 h1
  text "VRF" at 56.782,27.466 h1
  text "VG_RSTH" at 3.297,26.507 h1
  text "CLKOUT_N" at 51.794,25.669 h1
  text "VGRSTL" at 3.297,22.868 h1
  text "CLKOUT_P" at 51.794,21.656 h1
  text "OUTB0_N" at 3.424,20.132 h1
  text "VCBN" at 55.774,19.769 h1
  text "OUTB0_P" at 3.297,17.821 h1
  text "G" at 58.847,17.153 h1
  text "SPI_CLK" at 3.297,15.357 h1
  text "TDIG0" at 3.297,12.683 h1
  text "TDIG1" at 3.297,10.244 h1
  text "IN" at 3.297,7.628 h1
  text "RST" at 3.297,5.114 h1
  text "VDN" at 3.297,2.523 h1